# EAGLE board tx_no_transistor_adjustable_charging_current (EAGLE 9.6.1)
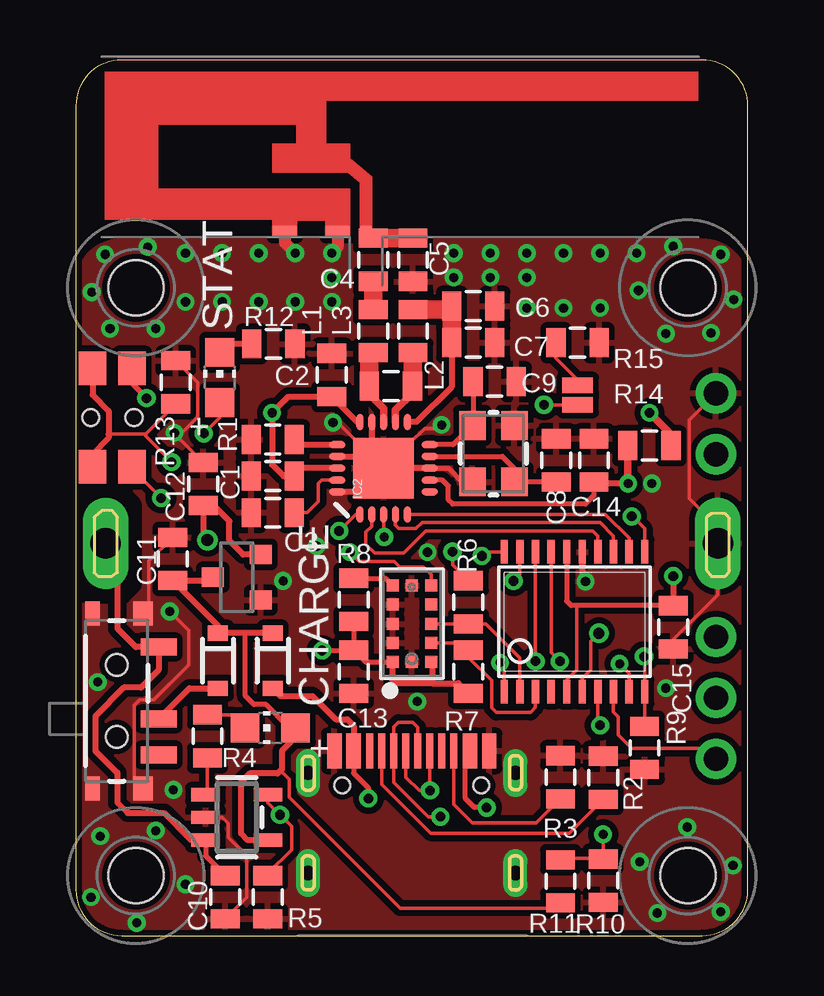
[diagram p0: board, top side]
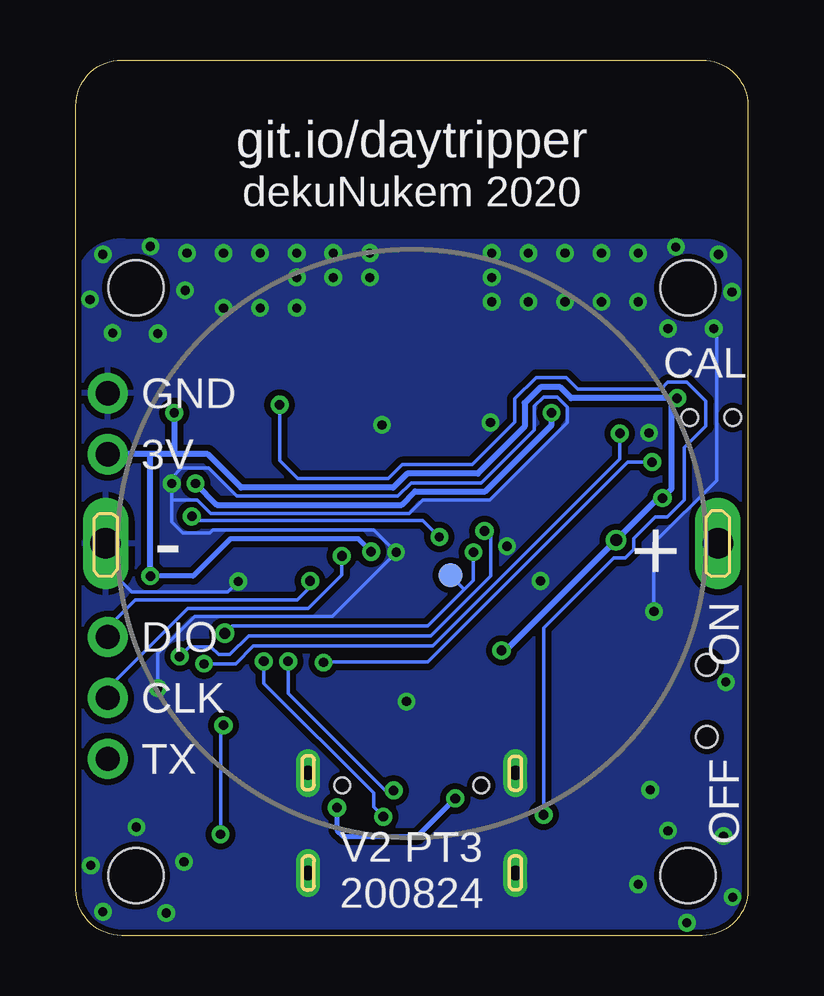
[diagram p1: board, bottom side, seen from below]

Size 28 x 36.5 mm. Coordinates in mm from the lower left corner, seen from the top.
Outline: 0,34.59 0,1.91 arc90 1.91,0 26.09,0 arc90 28,1.91 28,34.59 arc90 26.09,36.5 1.91,36.5 arc90 0,34.59
Copper layers (1*16): Top 0.035mm / dielectric 1.5mm / Bottom 0.035mm
Design rules "SparkFun-2-layer-6mil *": minimum track width 6mil, minimum drill 15mil, track to track 6mil, track to pad 6mil, pad to pad 6mil, via to via 6mil, smd to smd 6mil, copper to edge 8mil, drill to drill 6mil, minimum pad ring 7mil, minimum via ring 7mil, stop-mask expansion 4mil, vias tented up to drill 25mil, thermal gap 10mil
tRestrict: area 0.1,14.1 to 2.4,18.5

## Footprints (pad centres in the part's own frame; a part is rotated, then mirrored left to right if it is on the bottom)
TX_SPARKFUN-BATTERIES_BATTCON_24.5MM_PTH = drill 1.27 long: 1 -12.754,0; 2 12.754,0
0805 = smd 0.8 x 1.2: 1 -0.9,0; 2 0.9,0
SOD-323 = smd 0.63 x 0.83: A 1.15,0; C -1.15,0
TRACE_ANTENNA_2.4GHZ_25.7MM_TUNED = smd 0.46 x 0.46: ANT 0,0.23 | smd 1 x 0.46: GND -1.18,0.23; GND2 -3.38,0.23
TSSOP20 = smd 0.305 x 0.991: 1 -2.925,-2.918; 2 -2.275,-2.918; 3 -1.625,-2.918; 4 -0.975,-2.918; 5 -0.325,-2.918; 6 0.325,-2.918; 7 0.975,-2.918; 8 1.625,-2.918; 9 2.275,-2.918; 10 2.925,-2.918; 11 2.925,2.918; 12 2.275,2.918; 13 1.625,2.918; 14 0.975,2.918; 15 0.325,2.918; 16 -0.325,2.918; 17 -0.975,2.918; 18 -1.625,2.918; 19 -2.275,2.918; 20 -2.925,2.918
QFN20_ALT1 = smd 2.515 x 2.515: 0 0,0 | smd 0.686 x 0.293: 1 -1.925,0.986; 2 -1.925,0.493; 3 -1.925,0; 4 -1.925,-0.493; 5 -1.925,-0.986; 11 1.925,-0.986; 12 1.925,-0.493; 13 1.925,0; 14 1.925,0.493; 15 1.925,0.986 | smd 0.293 x 0.686: 6 -0.986,-1.925; 7 -0.493,-1.925; 8 0,-1.925; 9 0.493,-1.925; 10 0.986,-1.925; 16 0.986,1.925; 17 0.493,1.925; 18 0,1.925; 19 -0.493,1.925; 20 -0.986,1.925
1X03-CLEANBIG = drill 1.016 pad 1.676: 1 -2.54,0; 2 0,0; 3 2.54,0
SMT-JUMPER_2_NO_NO-SILK = smd 0.635 x 1.27: 1 -0.406,0; 2 0.406,0
CHIP-LED0805 = smd 1.2 x 1.2: A 0,-1.05; C 0,1.05
SWITCH-SPST-SMD-A = smd 0.7 x 1.5: 1 -2.25,-1.75; 2 -0.75,-1.75; 3 2.25,-1.75 | smd 1 x 0.6: G1 -3.65,1; G3 3.65,1 | smd 1 x 0.8: G2 -3.65,-1.1; G4 3.65,-1.1 | hole 0.9: -1.5,0; 1.5,0
342_SWICH_FOOT_HOLE = smd 1.4 x 1.15: P$1 -2.05,-0.825; P$2 -2.05,0.825; P$3 2.05,0.825; P$4 2.05,-0.825 | hole 0.7: 0,0.9; 0,-0.9
TP10R = smd 1 x 1: TP 0,0
LGA12_ST = smd 0.5 x 0.5: 1 1.6,-0.8; 2 0.8,-0.8; 3 0,-0.8; 4 -0.8,-0.8; 5 -1.6,-0.8; 6 -1.6,0; 7 -1.6,0.8; 8 -0.8,0.8; 9 0,0.8; 10 0.8,0.8; 11 1.6,0.8; 12 1.6,0
USBC_16P_FOOT = smd 0.6 x 1.45: A1B12 -3.225,3.848; A4B9 -2.425,3.848; B4A9 2.425,3.848; B11A12 3.225,3.848 | smd 0.3 x 1.45: A5 -1.25,3.848; A6 -0.25,3.848; A7 0.25,3.848; A8 1.25,3.848; B5 1.75,3.848; B6 0.75,3.848; B7 -0.75,3.848; B8 -1.75,3.848 | drill 0.6 pad 1 long: P$13 -4.32,2.933; P$14 4.32,2.933; P$15 -4.32,-1.248; P$16 4.32,-1.248 | hole 0.65: -2.89,2.402; 2.89,2.402
SOT23-5 = smd 0.55 x 1.2: 1 -0.95,-1.3; 2 0,-1.3; 3 0.95,-1.3; 4 0.95,1.3; 5 -0.95,1.3
SOT23R_INFINEON = smd 0.8 x 0.9: 1 -0.95,-1; 2 0.95,-1; 3 0,1
M2_SCREW_FOOT = hole 2.3: 0,0
1X02 = drill 1.016 pad 1.676: 1 -1.27,0; 2 1.27,0
CRYSTAL-SMD-3.2X2.5MM = smd 1.2 x 1.1: 1 -1.175,-0.875; 2 1.175,-0.875; 3 1.175,0.875; 4 -1.175,0.875

## Placement (x,y rotation side)
BT1  [TX_SPARKFUN-BATTERIES_BATTCON_24.5MM_PTH]  14,16.35 180 bottom
C1  4.7uF  [0805]  8.2,19.15 180 top
C2  4.7uF  [0805]  10.67,23.37 90 top
C3  100nF  [0805]  8.2,17.63 180 top
C4  1.5pF  [0805]  12.4,28.17 90 top
C5  1pF  [0805]  14.05,28.17 270 top
C6  2.2nF  [0805]  16.56,26.24 0 top
C7  4.7pF  [0805]  16.56,24.71 0 top
C8  12pF  [0805]  20.02,19.81 90 top
C9  12pF  [0805]  17.45,23.09 0 top
C10  4.7uF  [0805]  6.22,1.6 270 top
C11  4.7uF  [0805]  4.04,15.7 90 top
C12  4.7uF  [0805]  5.31,18.82 90 top
C13  100nF  [0805]  11.58,11 270 top
C14  4.7uF  [0805]  21.59,19.81 90 top
C15  100nF  [0805]  24.89,12.85 270 top
D1  BAT20J  [SOD-323]  8.2,11.46 270 top
D2  BAT20J  [SOD-323]  5.92,11.46 270 top
E1  ANTENNA  [TRACE_ANTENNA_2.4GHZ_25.7MM_TUNED]  12.09,29.11 0 top
IC1  STM32F030F4  [TSSOP20]  20.78,13.08 0 top
IC2  NRF24L01ALT1  [QFN20_ALT1]  12.83,19.48 90 top
JP1  [1X03-CLEANBIG]  26.67,9.91 90 top
JP2  JUMPER-SMT_2_NO_NO-SILK  [SMT-JUMPER_2_NO_NO-SILK]  20.9,22.53 270 top
L1  3.9nH  [0805]  12.4,25.2 90 top
L2  8.2nH  [0805]  13.13,22.91 0 top
L3  2.7nH  [0805]  14.05,25.2 90 top
LED1  [CHIP-LED0805]  8.1,8.66 90 top
LED2  [CHIP-LED0805]  5.99,23.27 0 top
R1  22K  [0805]  8.2,20.68 180 top
R2  5.1K  [0805]  21.97,6.58 90 top
R3  5.1K  [0805]  20.19,6.6 90 top
R4  5.1K  [0805]  5.49,8.31 270 top
R5  22K  [0805]  8,1.6 270 top
R6  5.1K  [0805]  16.36,13.89 90 top
R7  5.1K  [0805]  16.36,11 270 top
R8  22K  [0805]  11.58,14 270 top
R9  22K  [0805]  23.7,7.82 270 top
R10  22K  [0805]  20.19,2.26 270 top
R11  22K  [0805]  21.97,2.29 90 top
R12  5.1K  [0805]  8.23,24.66 180 top
R13  22K  [0805]  4.17,23.06 90 top
R14  1 Ohm  [0805]  23.9,20.42 180 top
R15  22K  [0805]  20.9,24.71 0 top
SW1  [SWITCH-SPST-SMD-A]  1.7,9.78 90 top
SW2  324_SW324_SWITCH_FOOT_HOLE  [342_SWICH_FOOT_HOLE]  1.52,21.59 90 top
TP2  TPTP10R  [TP10R]  12.4,15.01 0 bottom
U1  [LGA12_ST]  14,13 270 top
U2  USBC_16P  [USBC_16P_FOOT]  14,3.85 0 top
U3  MCP73831T-2ACI/OT  [SOT23-5]  6.71,4.93 270 top
U4  XC6206_DEV  [SOT23R_INFINEON]  6.71,14.94 90 top
U$1  M2_SCREW_DEV  [M2_SCREW_FOOT]  2.5,2.5 0 top
U$11  PINHD1X2  [1X02]  26.67,21.34 90 top
U$12  M2_SCREW_DEV  [M2_SCREW_FOOT]  25.5,2.5 0 top
U$13  M2_SCREW_DEV  [M2_SCREW_FOOT]  2.5,27 0 top
U$14  M2_SCREW_DEV  [M2_SCREW_FOOT]  25.5,27 0 top
Y1  16MHz_12pF  [CRYSTAL-SMD-3.2X2.5MM]  17.4,20.09 90 top

## Library data of the parts
BT1 = tx; SF_SKU: PRT-08863
C1-C9 C11-C15 = clock
C10 R4-R8 R10 R11 R15 = SparkFun-Passives
D1 D2 = SparkFun-DiscreteSemi; PROD_ID: DIO-11623
E1 = esp32-thing-temp
IC1 = exixe_pogo
IC2 = nRF24L01-Chip-v13
JP1 U$11 = adafruit_changed
JP2 = SparkFun-Jumpers
L1-L3 = basicBoard
LED1 LED2 R1-R3 R9 R12-R14 = joyAnalog
SW1 = tx
SW2 U4 U$1 U$12-U$14 = 3pos_slide_switch
TP2 = testpad
U1 = Adafruit VL53L0X
U2 = my_usbc_16p
U3 = microbuilder
Y1 = SparkFun-Clocks; PROD_ID: XTAL-12454

## Nets
+3V3: C12.1 C13.1 C15.1 IC1.5 IC1.16 R6.2 R7.2 R8.2 R14.1 SW2.P$1 SW2.P$4 U1.1 U1.11 U4.2 U$11.1
GND: BT1.2 C1.2 C2.2 C3.2 C5.2 C6.2 C7.2 C8.2 C9.2 C10.2 C11.2 C12.2 C13.2 C14.2 C15.2 E1.GND E1.GND2 IC1.15 IC2.0 IC2.8 IC2.14 IC2.17 IC2.20 R1.2 R2.2 R3.2 R5.2 R9.2 R11.1 R12.1 R13.2 R15.2 SW1.G1 SW1.G2 SW1.G3 SW1.G4 U1.2 U1.3 U1.4 U1.6 U1.12 U2.A1B12 U2.B11A12 U2.P$13 U2.P$14 U2.P$15 U2.P$16 U3.2 U4.1 U$11.2 Y1.2 Y1.4
N$1: C3.1 IC2.19
N$2: IC2.16 R1.1
N$3: IC2.13 L1.1 L2.1
N$4: C4.1 L1.2
N$5: C4.2 C5.1 E1.ANT
N$6: IC2.12 L2.2 L3.1
N$7: C8.1 IC2.9 Y1.1
N$8: C6.1 C7.1 IC2.11 L3.2
N$9: C9.1 IC2.10 Y1.3
N$10: R3.1 U2.B5
N$11: R2.1 U2.A5
N$12: LED1.C R4.1
N$13: R4.2 U3.1
N$14: IC1.13 IC2.4
N$15: IC1.12 IC2.5
N$16: IC1.11 IC2.3
N$17: JP2.2 R5.1 U3.5
N$18: IC1.18 U2.A6 U2.B6
N$19: D2.A SW1.2
N$20: IC1.14 IC2.2
N$21: IC1.10 IC2.1 R9.1
N$22: IC1.3 R7.1 U1.10
N$23: IC1.2 R6.1 U1.9
N$24: R8.1 U1.5
N$25: BT1.1 C10.1 SW1.3 U3.3
N$26: D1.A U2.A4B9 U2.B4A9
N$27: C11.1 D1.C D2.C LED1.A R10.2 U3.4 U4.3
N$28: LED2.C R12.2
N$29: IC1.9 LED2.A
N$30: IC1.1 R13.1 SW2.P$2 SW2.P$3
N$31: IC1.19 JP1.3
N$32: IC1.20 JP1.2
N$33: IC1.8 JP1.1
N$34: IC1.17 U2.A7 U2.B7
N$35: IC1.7 R10.1 R11.2
N$36: IC1.6 TP2.TP U1.7
N$37: C1.1 C2.1 C14.1 IC2.7 IC2.15 IC2.18 R14.2
N$38: JP2.1 R15.1

## Tracks (layer width: path | path; a pad name or v marks a point on that pad's centre or on a via)
+3V3  (via drill 0.38, 0.4, 0.5)
  Top 0.152: R6.2 15.7,15.45 v15.7,16 | IC1.5 20.45,10.65 20.87,11.06 20.87,13.74 | SW2.P$1 2.35,19.44 v3.56,18.24
  Top 0.203: R8.2 C13.1 | C13.1 12.08,11.4 U1.1 | v10.26,11.89 11.57,11.89 C13.1 | IC1.16 20.45,13.94 20.64,13.75 20.88,13.75 | C15.1 20.88,13.75 | 20.87,13.74 20.88,13.75 | v2.95,22.4 2.35,23 SW2.P$4
  Top 0.254: U1.1 13.2,10.52 14.85,10.52 | 14.85,10.52 14.85,11.35 U1.11 | 14.85,10.52 15.94,10.52 R7.2 | v24.89,14.99 C15.1 | U4.2 6.97,15.88 6.4,16.46 6.4,17.27 5.75,17.92 C12.1 5.31,16.66 v5.49,16.48
  Top 0.305: R14.1 24.8,20.89 v23.9,21.79
  Bottom 0.203: v15.7,16 16.23,16.54 21.57,16.54 23.11,14.99 v24.89,14.99
  Bottom 0.254: v10.26,11.89 10.08,11.89 v5.49,16.48 3.73,18.24 v3.56,18.24 3.17,18.62 3.17,22.17 v2.95,22.4 7.37,22.4 7.82,22.86 8.64,22.86 9.3,22.2 9.3,21.21 11.25,19.25 14.2,19.25 14.78,18.67 21.11,18.67 22.5,20.07 23.9,20.07 | 23.9,20.07 24.92,20.07 | 24.92,20.07 U$11.1 | v23.9,21.79 23.9,20.07 | v24.89,14.99 24.89,20.04 24.92,20.07
GND  (via drill 0.38)
  Top 0.152: IC2.0 12.33,19.98 | C15.2 24.89,12.34 26.75,14.21 BT1.2 26.75,17.01 25.55,18.21 25.55,21.49 U$11.2 | v10.72,21.39 10.92,21.39 11.68,20.62 12.33,20.62 | v15.24,21.29 15.09,21.13 14.53,21.13 13.92,20.52 12.38,20.52 12.33,20.57 | U3.2 6.1,4.93 6.35,4.67 6.35,4.09 7.11,3.33 7.11,1.59 C10.2 | SW1.G2 2.44,6.49 2.44,9.6 2.67,9.83 3.25,9.83 4.7,11.28 4.7,12.72 v3.91,13.51 | C11.2 3.05,15.61 3.05,13.68 SW1.G4 | C12.2 4.25,20.78 | 4.25,20.78 4.12,20.91 v4.12,20.95 | R13.2 5.08,23.05 5.08,21.61 4.25,20.78
  Top 0.203: IC2.8 15.52,19.48 16.09,18.92 Y1.4
  Top 0.254: IC2.17 11.79,19.98 | IC2.20 11.79,18.5 11.79,19.98 | IC2.14 12.33,20.62 12.33,20.57 12.33,19.98 11.79,19.98 | IC2.8 IC2.0 | IC1.15 21.1,14.89 v21.23,14.76
  Top 0.508: E1.GND2 8.71,28.88 v9.14,28.45 | E1.GND 10.91,28.69 v10.67,28.45
  Bottom 0.152: v24.59,10.31 24.59,11.76 23.04,13.31 17.32,13.31 v14.66,15.98 15.6,16.92 22.3,16.92 22.43,16.79 23.55,16.79 24,17.25 24,18.16 | 24,18.16 v24,18.85 24,19.07 23.6,19.48 22.45,19.48 21.29,18.31 14.58,18.31 14.02,18.87 11.1,18.87 8.89,21.08 8.89,22.07 8.51,22.45 7.95,22.45 7.52,22.02 7.52,21.39 10.74,18.16 13.54,18.16 14.1,17.6 22.38,17.6 22.94,18.16 24,18.16 | v21.23,14.76 21.67,14.33 25.68,14.33 26.75,15.4 BT1.2 | v3.91,13.51 3.91,16.36 1.29,18.97 1.29,25.17 v1.42,25.3
  other vias: 15.75,28.45 15.75,27.43 17.27,28.45 18.8,28.45 20.32,28.45 21.84,28.45 23.37,28.45 7.62,28.45 6.1,28.45 4.57,28.45 10.67,26.42 0.91,10.57 4.06,6.07 1.02,4.14 8.64,14.78 27.38,2.92 14.22,9.75 1.22,28.4 0.66,26.82 3,28.7 24.89,28.73 26.87,28.4 27.41,26.52 26.47,25.12 6.1,26.42 7.62,26.42 9.14,26.42 17.27,27.43 18.8,26.16 20.32,26.16 21.84,26.16 23.44,26.9 24.59,25.1 18.8,27.43 3.33,25.3 4.57,26.42 10.03,16.23 0.64,1.6 2.54,0.53 3.33,4.37 4.57,2.13 25.48,4.52 23.5,3.07 24.23,0.94 26.87,0.99 10.67,27.43
  pour Top (isolate 0.254): 0,27.09 0,1.91 arc90 1.91,0 26.09,0 arc90 28,1.91 28,27.09 arc90 26.09,29 1.91,29 arc90
  pour Bottom (isolate 0.254): 0,27.09 0,1.91 arc90 1.91,0 26.09,0 arc90 28,1.91 28,27.09 arc90 26.09,29 1.91,29 arc90
N$1
  Top 0.152: IC2.19 10.25,18.99 10.11,18.85 10.11,18.09 9.65,17.63 C3.1
N$2
  Top 0.254: R1.1 9.31,20.47 IC2.16
N$3
  Top 0.254: 12.23,22.57 L2.1
  Top 0.305: IC2.13 12.83,21.97 12.65,22.15 12.23,22.57
  Top 0.61: 12.23,24.13 L1.1
  Top 0.762: L2.1 12.23,24.13
N$4
  Top 0.762: L1.2 C4.1
N$5
  Top 0.508: E1.ANT 12.12,29.34 C4.2
  Top 0.762: C5.1 C4.2
N$6
  Top 0.254: 14.03,22.62 L2.2
  Top 0.305: IC2.12 13.32,21.91 14.03,22.62
  Top 0.61: L2.2 14.05,22.93
  Top 0.762: 14.05,22.93 L3.1
N$7
  Top 0.203: IC2.9 17.77,19.98 18.27,19.47 Y1.1 C8.1
N$8
  Top 0.254: IC2.11 14.19,21.41 15.66,22.87 C7.1
  Top 0.762: L3.2 15.52,26.1 | 15.52,26.1 C6.1 | C7.1 15.66,25.95 15.52,26.1
N$9
  Top 0.203: IC2.10 15.73,20.47 Y1.3 16.55,21.29 C9.1
N$10
  Top 0.152: R3.1 19.18,4.69 16.52,4.69 15.75,5.46 U2.B5
N$11
  Top 0.152: R2.1 20.56,4.27 14.78,4.27 12.75,6.3 U2.A5
N$12
  Top 0.152: R4.1 6.51,9.21 LED1.C
N$13
  Top 0.152: U3.1 5.49,5.96 R4.2
N$14
  Top 0.152: IC2.4 13.32,17.11 13.46,16.97 14.17,16.97 14.43,17.22 21.84,17.22 22.4,16.66 IC1.13
N$15
  Top 0.152: IC2.5 22.07,17.56 23.05,16.57 IC1.12
N$16  (via drill 0.38, 0.4)
  Top 0.152: IC2.3 12.83,16.64 v12.85,16.61 | v23.16,17.48 23.19,17.48 23.7,16.96 IC1.11
  Bottom 0.152: v23.16,17.48 22.99,17.3 13.54,17.3 v12.85,16.61
N$17  (via drill 0.4)
  Top 0.152: R5.1 8,2.59 8.99,3.58 8.99,4.55 v8.51,5.03 8.01,5.53 U3.5 | v19.51,22.12 JP2.2
  Bottom 0.152: v8.51,5.03 8.51,12.83 5.59,15.75 5.11,15.75 4.75,16.1 4.75,16.56 3.86,17.45 3.35,17.45 2.64,18.16 2.64,20.34 1.75,21.23 1.75,22.28 2.54,23.06 3.33,23.06 3.61,22.78 7.09,22.78 7.57,23.27 8.81,23.27 9.7,22.38 9.7,21.41 11.48,19.63 14.4,19.63 14.99,19.05 18.75,19.05 19.51,19.81 v19.51,22.12
N$18  (via drill 0.4)
  Top 0.152: IC1.18 v19.15,11.43 | U2.A6 13.75,6.59 14.3,6.04 v14.76,6.04 v14.75,6.05 U2.B6
  Bottom 0.152: v19.15,11.43 19.15,10.08 15.11,6.04 v14.76,6.04
N$19
  Top 0.254: SW1.2 4.73,10.3 D2.A
N$20
  Top 0.152: IC2.2 12.33,17.06 12.09,16.82 12.09,16.31 12.45,15.95 13.66,15.95 14.58,16.87 21.54,16.87 21.75,16.65 IC1.14
N$21  (via drill 0.4)
  Top 0.152: v23.67,11.63 23.7,11.6 IC1.10 R9.1 | IC2.1 11.66,17.56 v10.97,16.87
  Bottom 0.152: v10.97,16.87 10.72,16.61 10.72,14.99 13.21,12.5 20.8,12.5 21.59,11.71 22.05,11.71 22.38,12.04 23.27,12.04 v23.67,11.63
N$22
  Top 0.152: U1.10 16.06,12.2 R7.1 16.36,11.59 17.32,10.63 17.32,9.5 17.53,9.3 18.95,9.3 19.15,9.5 IC1.3
N$23
  Top 0.152: IC1.2 18.5,11.57 17.08,12.99 R6.1 U1.9
N$24
  Top 0.203: R8.1 12.9,14.89 U1.5
N$25
  Top 0.203: U3.3 5.41,3.32 C10.1
  Top 0.254: U3.3 4.81,3.98 3.68,5.11 2.16,5.11 1.73,5.54 1.73,6.78 0.81,7.7 0.81,9.14 2.01,10.34 2.72,10.34 3.45,11.07 SW1.3 2.5,12.03 1.73,12.8 1.73,15.87 BT1.1
N$26  (via drill 0.4)
  Top 0.203: v12.19,5.71 12.19,6.15 11.57,6.76 U2.A4B9 | v17.12,5.33 16.61,5.33 16.23,5.71 16.23,7.5 U2.B4A9
  Top 0.254: D1.A 8.53,9.98 9.86,9.98 10.82,9.02 11.3,9.02 11.57,8.74 U2.A4B9
  Bottom 0.203: v12.19,5.71 13.77,4.14 16.87,4.14 17.12,4.39 v17.12,5.33
N$27
  Top 0.152: R10.2 19.98,1.14 13.51,1.14 8.9,5.75 8.9,6.51 8.59,6.83 8.59,6.93
  Top 0.203: 7.06,12.61 7.06,9.98 7.42,9.63 7.93,9.63 8.9,8.66 LED1.A
  Top 0.254: D1.C 7.06,12.61 7.01,12.61 D2.C 5.92,12.92 C11.1 5.57,14.8 | 5.57,14.8 U4.3 5.57,14.8 | U3.4 7.15,3.98 6.88,4.24 6.88,6.4 7.24,6.76 8.41,6.76 8.59,6.93 8.59,7.7 9.15,8.26 LED1.A
N$28
  Top 0.254: R12.2 6.34,24.66 LED2.C
N$29  (via drill 0.38, 0.4)
  Top 0.152: IC1.9 23.05,10.93 v22.66,11.33 | LED2.A 5.99,21.59 v5.33,20.93
  Bottom 0.152: v5.33,20.93 5.33,19.86 13.13,12.06 20.6,12.06 21.34,11.33 v22.66,11.33
N$30  (via drill 0.38, 0.4)
  Top 0.152: v17.68,11.38 17.85,11.21 IC1.1 | R13.1 2.91,20.9 | 2.91,20.9 1.37,20.9 | v3.99,19.74 2.91,20.82 2.91,20.9
  Top 0.254: SW2.P$3 0.7,22.54 1.37,21.87 1.37,20.9 1.37,20.75 0.7,20.08 SW2.P$2
  Bottom 0.152: v17.68,11.38 17.65,11.4 13.34,11.4 5,19.74 v3.99,19.74
N$31  (via drill 0.4)
  Top 0.152: IC1.19 18.5,15.05 v18.24,14.78
  Bottom 0.152: v18.24,14.78 18.24,14.53 18.77,13.99 25.53,13.99 26.67,12.85 JP1.3
N$32  (via drill 0.4)
  Top 0.152: IC1.20 17.09,16 v16.92,15.82
  Bottom 0.152: v16.92,15.82 16.92,15.04 18.31,13.64 23.34,13.64 26.67,10.31 JP1.2
N$33
  Top 0.152: JP1.1 26.24,7.8 23.16,7.8 22.61,8.36 22.61,9.12 22.4,9.32 IC1.8
N$34  (via drill 0.4)
  Top 0.152: IC1.17 19.8,11.79 v20.17,11.43 | v15.19,4.95 14.68,4.95 13.25,6.38 U2.B7 13.25,8.7 13.44,8.89 14.05,8.89 14.25,8.69 U2.A7
  Bottom 0.152: v15.19,4.95 15.6,5.36 15.6,5.94 20.17,10.52 v20.17,11.43
N$35  (via drill 0.38, 0.4)
  Top 0.152: IC1.7 21.75,8.86 v21.84,8.76 | v21.97,4.22 21.97,3.23 | 21.97,3.23 R11.2 | R10.1 20.26,3.23 21.97,3.23
  Bottom 0.152: v21.97,4.22 21.97,8.64 v21.84,8.76
N$36  (via drill 0.38, 0.45)
  Top 0.152: IC1.6 21.1,10.71 21.46,11.07 21.46,12.27 v21.79,12.6 | U1.7 14.8,15.04 14.48,15.37 13.49,15.37 13.26,15.6 11.81,15.6 v11.43,15.98
  Bottom 0.152: v21.79,12.6 21.49,12.9 13.34,12.9 11.81,14.43 | v11.43,15.98 11.43,14.81 11.81,14.43 | TP2.TP 11.81,14.43
N$37  (via drill 0.38)
  Top 0.203: IC2.7 15.28,18.99 15.52,18.75 15.52,18.16 15.7,17.98 21.23,17.98 21.59,18.34 C14.1
  Top 0.254: IC2.18 9.43,19.48 C1.1 8.66,19.15 8.18,19.63 v8.18,21.79 8.85,22.47 C2.1 11.73,21.41 IC2.15 | C14.1 21.66,18.85 v23.01,18.85 v23,18.86
  Top 0.305: R14.2 v23,18.86
  Bottom 0.254: v23.01,18.85 22.12,17.96 14.43,17.96 13.87,18.52 10.95,18.52 8.18,21.29 v8.18,21.79
N$38
  Top 0.152: JP2.1 20.9,23.16 20,24.07 R15.1

## Text on the board
tNames: STAT | CHARGE
bNames: git.io/daytripper | dekuNukem 2020 | CAL | GND | 3V | - | ON | DIO | CLK | OFF | TX | V2 PT3 / 200824